# EAGLE board ECE180DA (EAGLE 9.2.2)
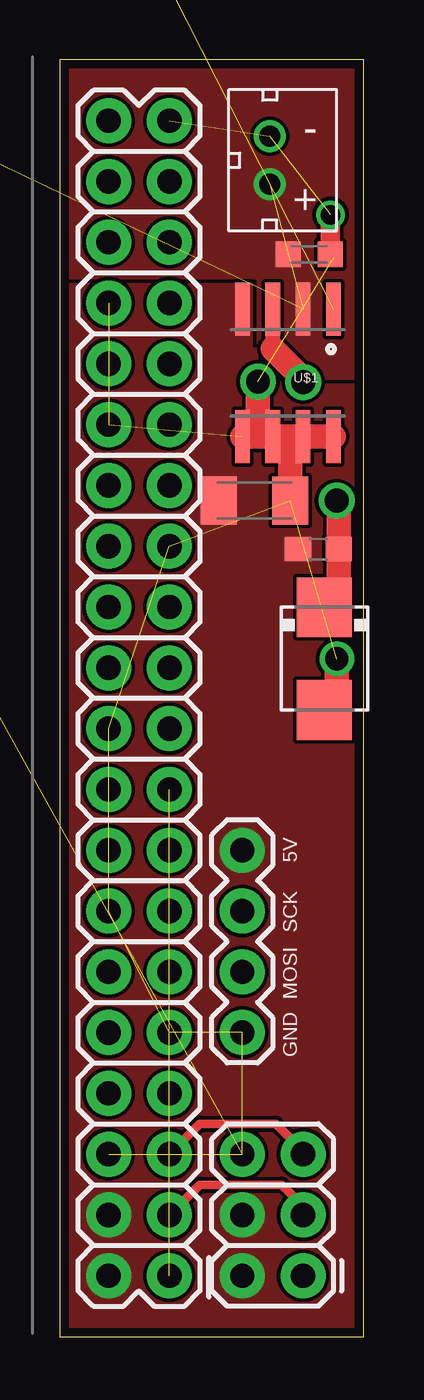
[diagram p0: board, top side]
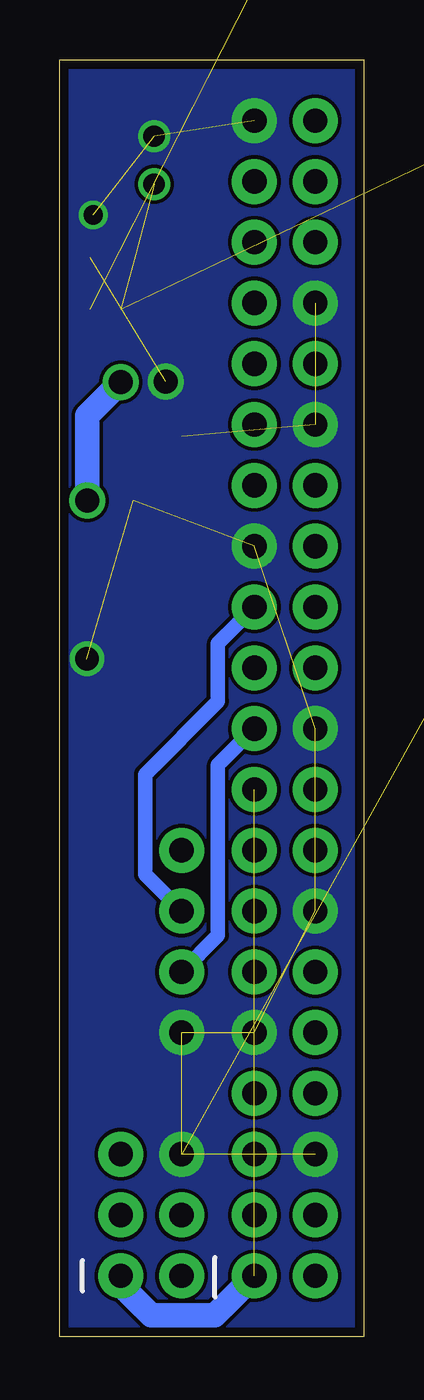
[diagram p1: board, bottom side, seen from below]

Size 12.7 x 53.34 mm. Coordinates in mm from the lower left corner, seen from the top.
Outline: 0,0 12.7,0 12.7,53.34 0,53.34 0,0
Copper layers (1*16): Top 0.035559375mm / dielectric 1.6mm / Bottom 0.035559375mm
Design rules "oshpark-2layer": minimum track width 6mil, minimum drill 10mil, track to track 6mil, track to pad 6mil, pad to pad 6mil, via to via 6mil, smd to smd 6mil, copper to edge 15mil, drill to drill 6mil, minimum pad ring 5mil, minimum via ring 5mil, stop-mask expansion 2.5mil, vias tented up to drill 0mil, thermal gap 10mil

## Footprints (pad centres in the part's own frame; a part is rotated, then mirrored left to right if it is on the bottom)
BATTERY-AA = drill 1.854: GND@1 25.146,0; GND@2 17.78,0; PWR@1 -25.146,0; PWR@2 -17.78,0
C0603K = smd 1.05 x 1.08: 1 -0.875,0; 2 0.875,0
C1206K = smd 1.5 x 2: 1 -1.5,0; 2 1.5,0
DO214AA = smd 2.5 x 2.3: A 2.15,0; C -2.15,0
2X20 = drill 1.016 pad 1.88: 1 0,0; 2 0,2.54; 3 2.54,0; 4 2.54,2.54; 5 5.08,0; 6 5.08,2.54; 7 7.62,0; 8 7.62,2.54; 9 10.16,0; 10 10.16,2.54; 11 12.7,0; 12 12.7,2.54; 13 15.24,0; 14 15.24,2.54; 15 17.78,0; 16 17.78,2.54; 17 20.32,0; 18 20.32,2.54; 19 22.86,0; 20 22.86,2.54; 21 25.4,0; 22 25.4,2.54; 23 27.94,0; 24 27.94,2.54; 25 30.48,0; 26 30.48,2.54; 27 33.02,0; 28 33.02,2.54; 29 35.56,0; 30 35.56,2.54; 31 38.1,0; 32 38.1,2.54; 33 40.64,0; 34 40.64,2.54; 35 43.18,0; 36 43.18,2.54; 37 45.72,0; 38 45.72,2.54; 39 48.26,0; 40 48.26,2.54
2X3 = drill 1.016 pad 1.88: 1 0,0; 2 0,2.54; 3 2.54,0; 4 2.54,2.54; 5 5.08,0; 6 5.08,2.54
1X04 = drill 1.016 pad 1.88: 1 0,0; 2 2.54,0; 3 5.08,0; 4 7.62,0
0603 = smd 1.1 x 1: 1 -0.85,0; 2 0.85,0
CL-SB-12B = smd 1.2 x 1.4: 1 -2.5,-2.25; 2 0,2.25; 3 2.5,-2.25 | hole 0.9: 3.4,0; -3.4,0
SOIC-8 = smd 0.61 x 2.21: 1 -1.905,-2.54; 2 -0.635,-2.54; 3 0.635,-2.54; 4 1.905,-2.54; 5 1.905,2.794; 6 0.635,2.794; 7 -0.635,2.794; 8 -1.905,2.794
JST_CONNECTOR_FEMALE = drill 0.889: + 0,1; - 0,-1

## Placement (x,y rotation side)
BT1  [BATTERY-AA]  -8.76,26.8 270 top  (outside the outline)
BT2  [BATTERY-AA]  -25.53,26.8 90 top  (outside the outline)
BT3  [BATTERY-AA]  -42.42,26.8 270 top  (outside the outline)
BT4  [BATTERY-AA]  -50.67,26.8 90 bottom  (outside the outline)
BT5  [BATTERY-AA]  -33.91,26.8 270 top  (outside the outline)
BT6  [BATTERY-AA]  -17.02,26.8 90 top  (outside the outline)
C1  15uF  [C0603K]  10.41,45.21 0 top
C2  220uF  [C1206K]  8.13,34.92 0 top
D1  S2A  [DO214AA]  11.05,28.32 270 top
J1  RASPBERRYPI-40-PIN-GPIO_PTH_NO_SHROUD  [2X20]  4.57,2.54 90 top
J2  FEMALE 2x3  [2X3]  10.16,2.54 90 top
J3  [1X04]  7.62,20.32 270 top
L1  68uH  [0603]  10.79,32.89 180 top
S1  CL-SB-12B-01T  [CL-SB-12B]  -0.64,62.23 270 top  (outside the outline)
U$1  MIC4680  [SOIC-8]  9.53,40.39 180 top
U$3  JST_CONNECTOR_FEMALE  [JST_CONNECTOR_FEMALE]  8.76,49.15 180 top

## Library data of the parts
BT1-BT6 = SparkFun-Batteries; PROD_ID: BATT-08316; SF_SKU: PRT-07949
C1 C2 = resistor
D1 = s2x_10; MF: Fairchild; MPN: S2A; OC_FARNELL: 1467485; OC_NEWARK: 58K2391
J1 = SparkFun-Connectors
J2 = SparkFun-Connectors; PROD_ID: CONN-11566
J3 = SparkFun-Connectors; PROD_ID: CONN-09696
L1 = SparkFun-Coils; PROD_ID: NDUC-07874
S1 = CL-SB-12B-01T; AVAILABILITY: Unavailable; DESCRIPTION: Switch Slide N.O./N.C. SPDT Top Slide 0.2A 12VDC Gull Wing SMD T/R; MF: Nidec Copal; MP: CL-SB-12B-01T; PACKAGE: None; PRICE: None
U$1 = MIC4680; AVAILABILITY: Unavailable; MF: Micrel; MP: MIC4680; PACKAGE: None; PRICE: None
U$3 = AP_quad

## Nets
3V3: J1.1 J1.17 J2.1
5V: C2.1 J1.2 J1.4 J2.2 J2.4 J3.1 L1.2 U$1.4
9V: BT1.PWR@1 C1.1 S1.3 U$1.2 U$3.+
GND: BT6.GND@1 C1.2 C2.2 D1.A J1.6 J1.9 J1.14 J1.20 J1.25 J1.30 J1.34 J1.39 J2.6 J3.4 U$1.5 U$1.6 U$1.7 U$1.8 U$3.-
MOSI: J1.19 J3.3
N$1: BT1.GND@1 BT2.PWR@1
N$2: BT2.GND@1 BT3.PWR@1
N$3: BT3.GND@1 BT4.PWR@1
N$4: BT4.GND@1 BT5.PWR@1
N$5: BT5.GND@1 BT6.PWR@1
N$7: D1.C L1.1 U$1.3
SCK: J1.23 J3.2
SCL: J1.5 J2.5
SDA: J1.3 J2.3
SHUTDOWN: S1.2 U$1.1

## Tracks (layer width: path | path; a pad name or v marks a point on that pad's centre or on a via)
3V3  (1 unrouted)
  Bottom 1.016: J1.1 6.22,0.89 8.89,0.89 10.16,2.16 J2.1
5V
  pour Top (rank 2, no thermals): 12.7,39.88 8.26,39.88 8.26,44.2 0,44.2 0,0 12.7,0
9V  (4 unrouted)
  pour Top (no thermals): 0,53.34 12.7,53.34 12.7,40.01 8.26,40.01 8.26,44.2 0,44.2
GND  (via drill 0.8, 0.97, 1)  (14 unrouted)
  Top 0.61: 11.43,45.07 C1.2
  Top 0.813: C1.2 11.29,46.85 v11.3,46.86
  Top 1.016: U$1.5 U$1.6 | U$1.6 9.65,37.59 | 9.65,37.59 U$1.7 U$1.8 | C2.2 9.63,37.57 9.65,37.59 | U$1.6 8.27,38.21 v8.27,39.9 | D1.A 11.57,26.69 v11.57,28.32
  pour Bottom (no thermals): 0,53.34 0,0 12.7,0 12.7,53.34
MOSI
  Bottom 0.61: J3.3 6.1,16.76 6.1,23.88 J1.19
N$1  (1 unrouted)
N$2  (1 unrouted)
N$3  (1 unrouted)
N$4  (1 unrouted)
N$5  (1 unrouted)
N$7  (via drill 1)
  Top 0.61: U$1.3 8.89,41.27
  Top 1.016: v11.56,34.92 11.64,34.84 L1.1 11.64,31.07 D1.C | 8.89,41.27 10.16,40.01 v10.16,39.88
  Bottom 1.016: v10.16,39.88 11.56,38.48 v11.56,34.92
SCK
  Bottom 0.61: J3.2 9.14,19.3 9.14,23.5 6.1,26.54 6.1,28.96 J1.23
SCL
  Top 0.356: J1.5 5.84,8.89 9.02,8.89 10.16,7.75 J2.5
SDA
  Top 0.356: J1.3 5.84,6.35 9.27,6.35 10.16,5.46 J2.3
SHUTDOWN  (1 unrouted)

## Text on the board
tPlace: 5V | SCK | MOSI | GND